# Altium PCB STM32 Core board.PcbDoc
Units mil, origin at the board's own origin, x right, y up, seen from the top; angles counter-clockwise.
Board outline 2495 x 2645 mil, 2 copper layers (Top Layer, Bottom Layer); 73 components, 59 nets, 237 pads, 40 vias.
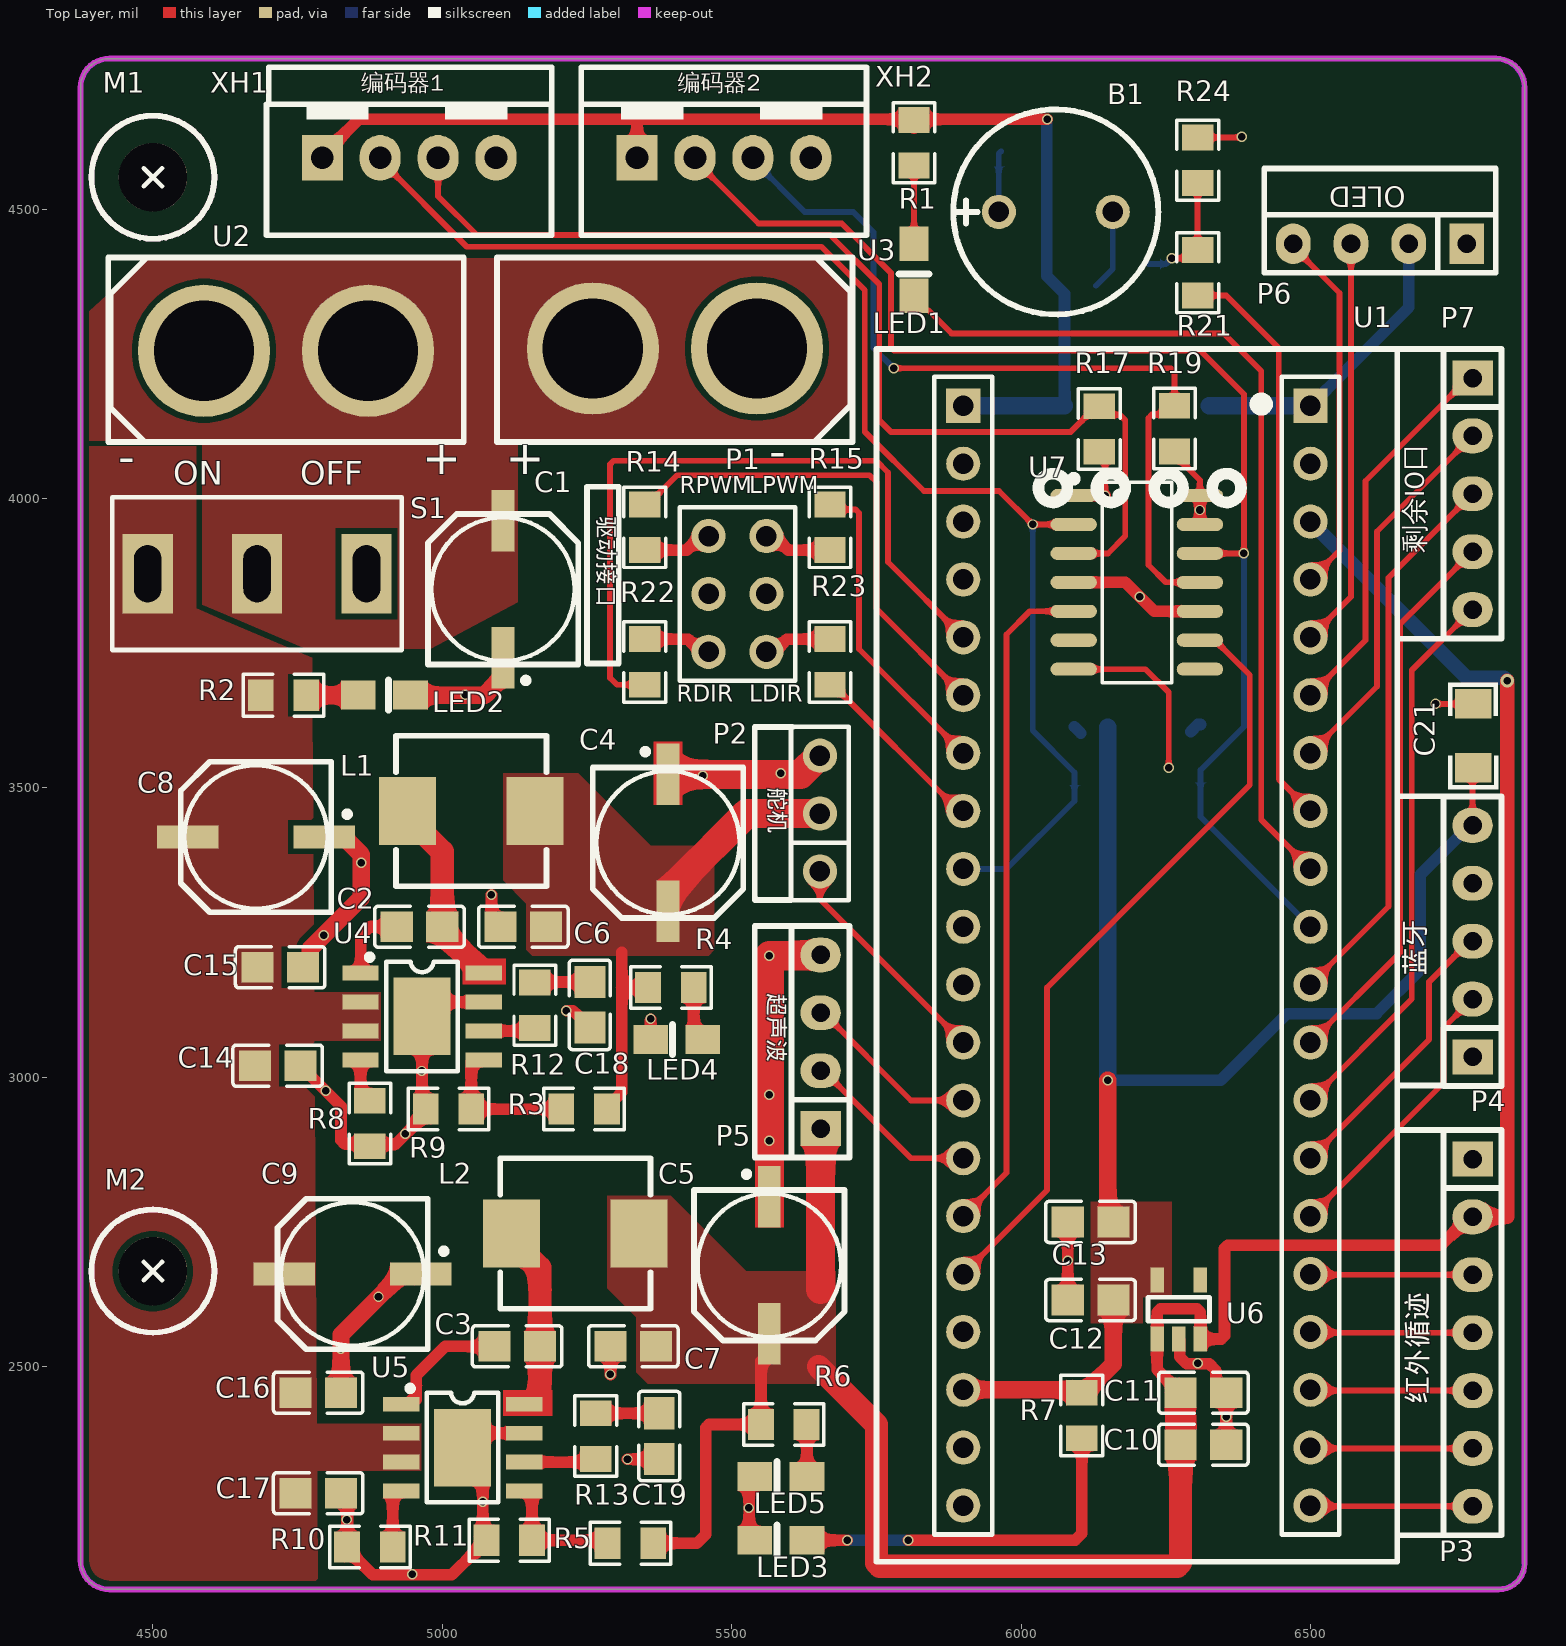
[diagram p0: Top Layer view]
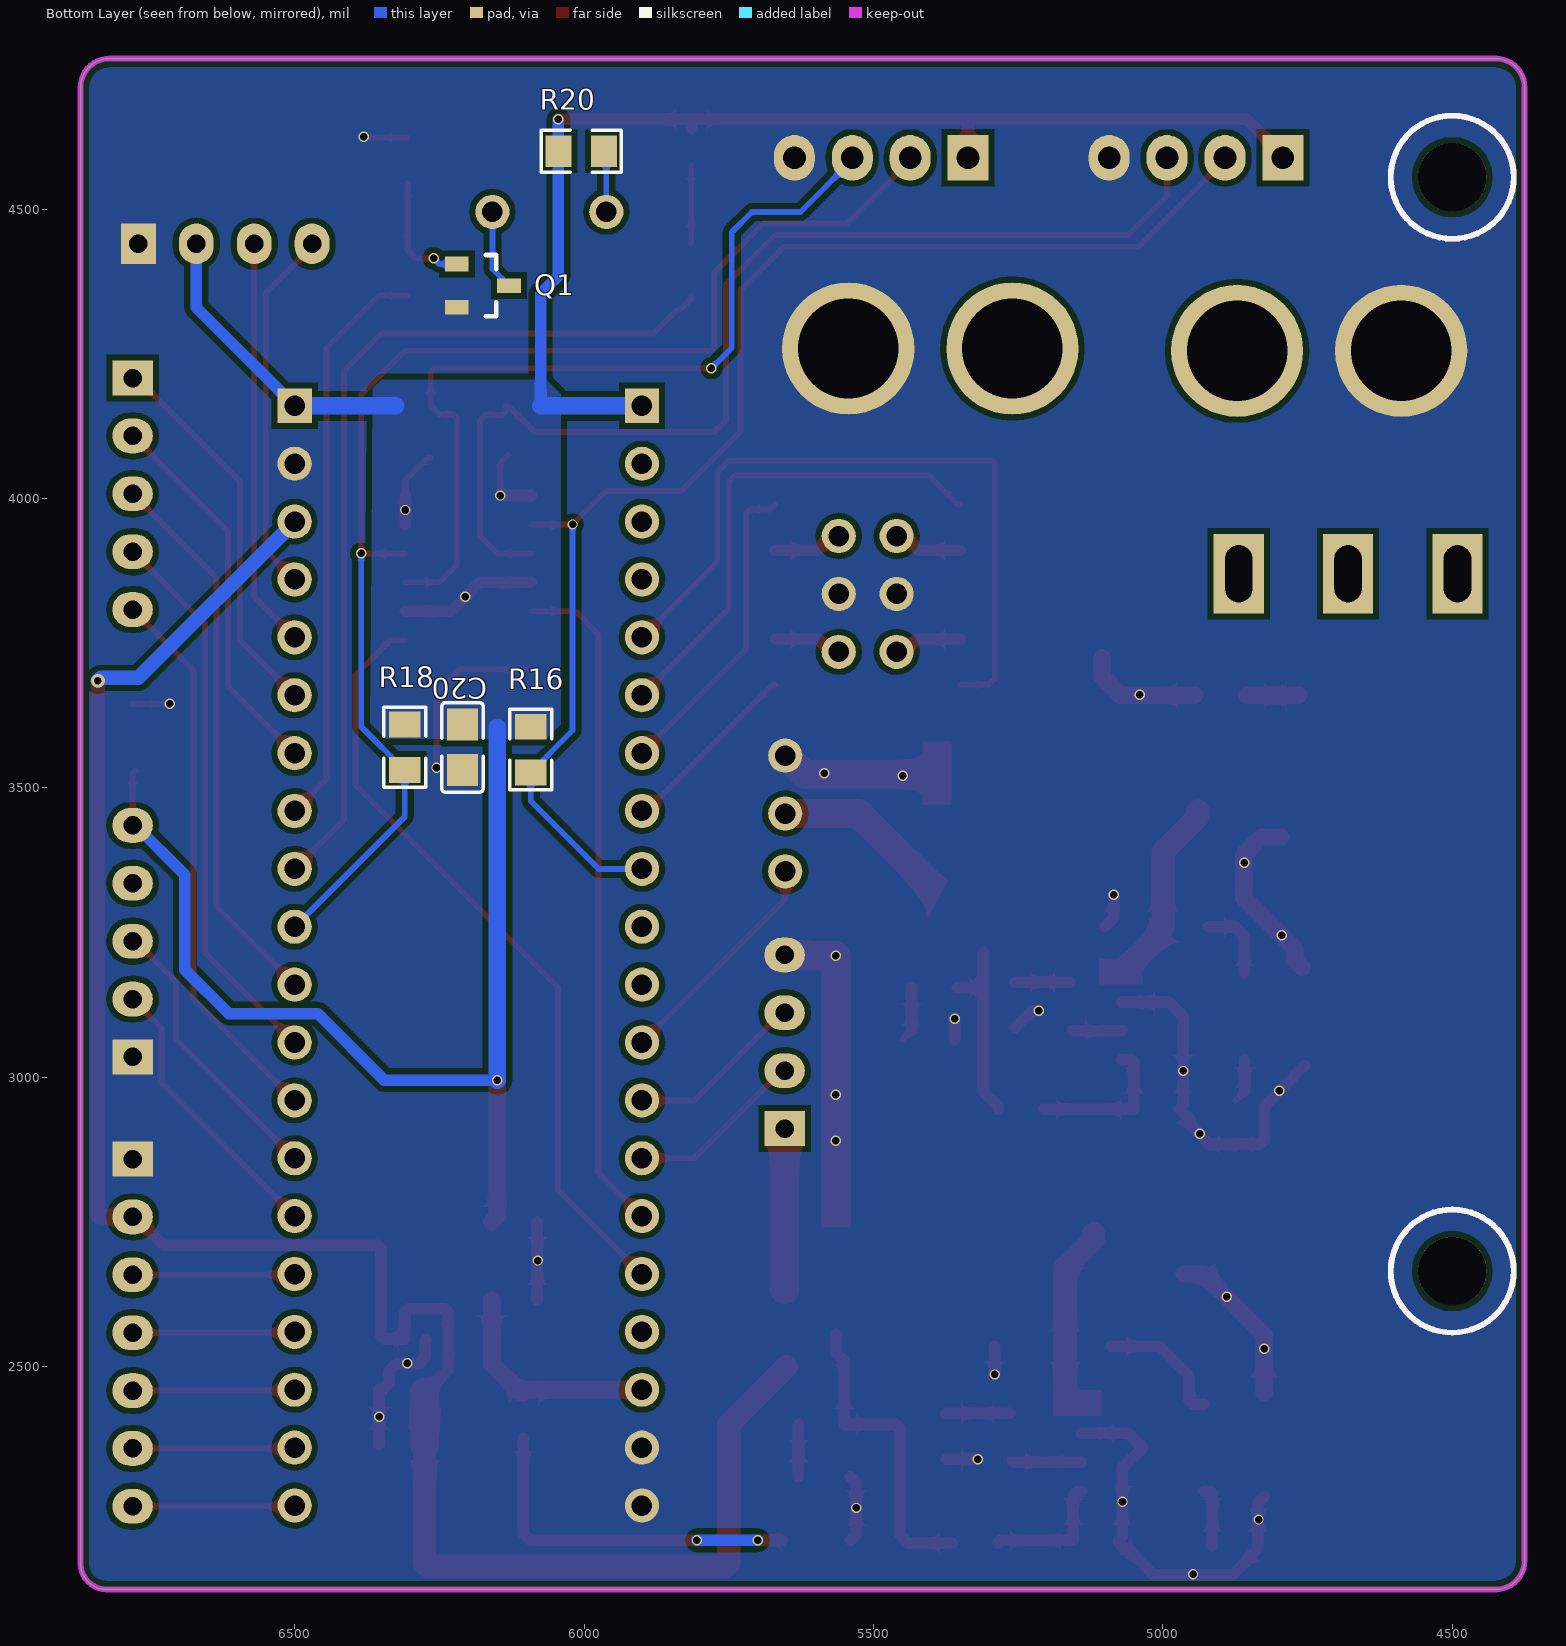
[diagram p1: Bottom Layer view, seen from below]

## Layer stack, top to bottom
Top Solder: solder mask 0.4, Solder Resist, Dk 3.5
Top Layer: signal copper 1.4
Dielectric 1: dielectric 12.6, FR-4, Dk 4.8
Bottom Layer: signal copper 1.4
Bottom Solder: solder mask 0.4, Solder Resist, Dk 3.5

## Board outline
4375,2165 4375,4710 cw(c4425,4710) 4425,4760 4440,4760 6820,4760 cw(c6820,4710) 6870,4710 6870,2160 cw(c6825,2160) 6825,2115 4425,2115 cw(c4425,2165)

## Design rules (kind name [scope] priority, off if disabled: settings)
Clearance [All] p1: gap=10 ignorepadtopadclearanceinfootprint=FALSE except(0: Arc-Hole Track-Hole SMDPad-Hole THPad-Hole Via-Hole Fill-Hole Poly-Hole Region-Hole Text-Hole)
PolygonConnect [All] p1: connectstyle=Direct reliefconductorwidth=10 reliefentries=4 polygonreliefangle="90 Angle" airgapwidth=10
RoutingVias [All] p1: holewidth=28 width=50 viastyle="Through Hole" minholewidth=28 minwidth=50 maxholewidth=28 maxwidth=50
SolderMaskExpansion [All] p1: expansion=4 istentingtop=FALSE
Width [All] p1: maxlimit=10 minlimit=10 preferedwidth=10
30 further rules are at their usual default settings.

## Components (designator, comment, footprint, x,y, rotation, side; value= is the part's Value field where it differs from the comment)
B1 "BEEP" "BEEP 9x5.5mm" 6060,4495 r0 top
C1 "220uF 25V 铝电解" "CAP-E-S 6.3" 5105,3843.11 r270 top value=220uF
C2 "100nF 50V X7R" C0805 4960.63,3260 r180 top value=100nF
C3 "100nF 50V X7R" C0805 5129.37,2535 r180 top value=100nF
C4 "220uF 25V 铝电解" "CAP-E-S 6.3" 5390,3405 r90 top value=220uF
C5 "220uF 25V 铝电解" "CAP-E-S 6.3" 5565,2675 r90 top value=220uF
C6 "47uF 25V X5R" C0805 5140,3260 r0 top value=47uF
C7 "47uF 25V X5R" C0805 5330,2535 r0 top value=47uF
C8 "100uF 35V 铝电解" "CAP-E-S 6.3" 4678.11,3415 r0 top value=100uF
C9 "100uF 35V 铝电解" "CAP-E-S 6.3" 4845,2660 r0 top value=100uF
C10 "10uF 25V X5R" C0805 6315,2365 r180 top value=10uF
C11 "100nF 50V X7R" C0805 6315,2455 r180 top value=100nF
C12 "10uF 25V X5R" C0805 6120,2615 r0 top value=10uF
C13 "100nF 50V X7R" C0805 6120,2750 r0 top value=100nF
C14 "4.7uF 35V X5R" C0805 4715.63,3020 r180 top value=4.7uF
C15 "100nF 50V X7R" C0805 4720,3190 r180 top value=100nF
C16 "4.7uF 35V X5R" C0805 4785.63,2455 r180 top value=4.7uF
C17 "100nF 50V X7R" C0805 4785.63,2281.19 r180 top value=100nF
C18 "4.7nF 50V X7R" C0805 5255,3125 r90 top value=4.7nF
C19 "4.7nF 50V X7R" C0805 5375,2380 r90 top value=4.7nF
C20 "100nF 50V X7R" C0805 6210,3570 r270 bottom value=100nF
C21 "10uF 35V X5R" CAPC3216[1206]S 6780.99,3589.82 r270 top value=10uF
L1 "4.7uH 5A" "0630 TPC 7*7*3" 5050,3460 r0 top value=4.7uH
L2 "4.7uH 5A" "0630 TPC 7*7*3" 5230,2730 r0 top value=4.7uH
LED1 "翠绿贴片LED" LED_0805 5815,4440 r270 top
LED2 "翠绿贴片LED" LED_0805 4855,3660 r0 top
LED3 "翠绿贴片LED" LED_0805 5630,2200 r180 top
LED4 "翠绿贴片LED" LED_0805 5450,3065 r180 top
LED5 "翠绿贴片LED" LED_0805 5630,2310 r180 top
M1 "MountHole" M3-MountHole 4500,4555 r0 top
M2 "MountHole" M3-MountHole 4500,2665 r0 top
P1 "Header-D-M 2x3P" HDR2X3-M 5560,3735 r90 top
P2 "Header-D-M 1x3P" HDR1X3-M 5652.51,3355.56 r90 top
P3 "Pin HDR1X7" "Pin HDR1X7/2.54mm-S" 6780,2858.62 r0 top
P4 "Female HDR1X5" Fe-HDR1X5/2.54-S 6780,3035 r180 top
P5 "Pin HDR1X4" "Pin HDR1X4/2.54mm-S" 5653.57,2911.22 r180 top
P6 "Female HDR1X4" Fe-HDR1X4/2.54-S 6770,4440 r270 top
P7 "Pin HDR1X5" "Pin HDR1X5/2.54mm-S" 6780,4208 r0 top
Q1 "S8050" SOT-23 6174.72,4367.6 r180 bottom
R1 "510R ±1%" "R0805 - duplicate" 5815,4614.37 r270 top value=510R
R2 "10K ±1%" "R0805 - duplicate" 4725.63,3660 r180 top value=10K
R3 "65K ±1%" "R0805 - duplicate" 5245,2945 r0 top value=65K
R4 "10K ±1%" "R0805 - duplicate" 5395,3155 r0 top value=10K
R5 "53.6k ±1%" "R0805 - duplicate" 5325,2195 r0 top value=53.6k
R6 "10K ±1%" "R0805 - duplicate" 5590,2400 r0 top value=10K
R7 "2.7K ±1%" "R0805 - duplicate" 6105,2415.63 r270 top value=2.7K
R8 "200K ±1%" "R0805 - duplicate" 4875,2920 r90 top value=200K
R9 "10K ±1%" "R0805 - duplicate" 5010.63,2945 r180 top value=10K
R10 "200K ±1%" "R0805 - duplicate" 4875,2188.4 r0 top value=200K
R11 "10K ±1%" "R0805 - duplicate" 5115.63,2200 r180 top value=10K
R12 "20K ±1%" "R0805 - duplicate" 5160,3124.37 r270 top value=20K
R13 "20K ±1%" "R0805 - duplicate" 5265,2380 r270 top value=20K
R14 "100R ±1%" "R0805 - duplicate" 5350,3950 r270 top value=100R
R15 "100R ±1%" "R0805 - duplicate" 5669.76,3950 r270 top value=100R
R16 "5.1K ±1%" "R0805 - duplicate" 6092.18,3566.04 r90 bottom value=5.1K
R17 "5.1K ±1%" "R0805 - duplicate" 6135,4120 r270 top value=5.1K
R18 "5.1K ±1%" "R0805 - duplicate" 6310,3570 r90 bottom value=5.1K
R19 "5.1K ±1%" "R0805 - duplicate" 6265,4120.63 r270 top value=5.1K
R20 "10R ±1%" "R0805 - duplicate" 6005,4600 r180 bottom value=10R
R21 "4.7K ±1%" "R0805 - duplicate" 6305,4390 r90 top value=4.7K
R22 "100R ±1%" "R0805 - duplicate" 5350,3717.52 r270 top value=100R
R23 "100R ±1%" "R0805 - duplicate" 5669.76,3717.52 r270 top value=100R
R24 "1K ±1%" "R0805 - duplicate" 6305,4584.37 r90 top value=1K
S1 "SW-SPDT" SS12D10 4680,3870 r0 top
U1 "STM32 40Pin Core board" "STM32 CORE BOARD" 6220,3218 r90 top
U2 "XT60" CONN-TH_XT60 4730,4255 r0 top
U3 "XT60" CONN-TH_XT60 5401.85,4258.9 r180 top
U4 "SCT2450" SOP-8E 4965,3105 r0 top
U5 "SCT2450" SOP-8E 5035,2360 r0 top
U6 "RT9013-33" SOT-23-5 6272.4,2598.82 r90 top
U7 "SN74HC74D" SOIC-14_L8.7-W3.9-P1.27-LS6.0-BL 6200,3855 r270 top
XH1 "XH4" "XH4/2.54mm/180 - duplicate" 4792.76,4588.42 r0 top
XH2 "XH4" "XH4/2.54mm/180 - duplicate" 5336.63,4588.42 r0 top

## Footprints (in the part's own frame and the unit in brackets; to place one, negate y for a bottom-side part, rotate by r counter-clockwise, add the part's x,y. Pads: shape width x height; smd on the part's side, far side on the other; paste and mask are expansions set on the pad)
"0630 TPC 7*7*3" [mm] "12mmx12mmx6.5mm 一体成型功率电感"
  rect 2.5x3 smd: 1(-2.8,0) 2(2.8,0)
  silkscreen extent -3.3,-3.3 3.3,3.3, body extent -3.3,-3.3 3.3,3.3, height 3
"BEEP 9x5.5mm" [mm] "蜂鸣器 9x5.5mm"
  round 1.5 hole 0.9: 1(-2.5,0) 2(2.5,0)
  silkscreen extent -4.5,-4.5 4.5,4.5, body extent -4.77,-4.8 4.83,4.8, height 5.05
C0805 [mm]
  rect 1.41x1.35 smd paste-100 mask+0.051: 1(-1,0) 2(1,0)
  silkscreen extent -1.96,-0.9 1.96,0.9
"CAP-E-S 6.3" [mm] "贴片 铝电解电容 6.3mm"
  rect 2.7x1 smd: 1(-3,0) 2(3,0)
  silkscreen extent -3.3,-3.3 4.12,3.3, body extent -3.5,-3.3 3.5,3.3, height 5.2
CAPC3216[1206]S [mm] "1206贴片电容 有丝印 2脚 3.20x1.60mm IPC中密度"
  rect 1.3x1.6 smd: 1(-1.4,0) 2(1.4,0)
  silkscreen extent -2.35,-1.11 2.35,1.11, body extent -1.6,-0.81 1.6,0.81, height 1.21
CONN-TH_XT60 [mm]
  round 5.8 hole 4.4 paste+0 mask+0.05: 1(-3.6,0) 2(3.6,0)
  silkscreen extent -7.8,-4 7.8,4.1
Fe-HDR1X4/2.54-S [mil]
  rect 70x60 hole 32: 1(0,0)
  oval 70x60 hole 32: 2(0,-100) 3(0,-200) 4(0,-300)
  silkscreen extent -50,-350 50,50, body extent -44,-355 54,55, height 335
Fe-HDR1X5/2.54-S [mil]
  rect 70x60 hole 32: 1(0,0)
  oval 70x60 hole 32: 2(0,-100) 3(0,-200) 4(0,-300) 5(0,-400)
  silkscreen extent -50,-450 50,50, body extent -50,-455 48,55, height 126
HDR1X3-M [mm] "1x3pin, 2.54mm间距, 直插, 直排针"
  round 1.5 hole 0.9: 1(0,0) 2(2.54,0) 3(5.08,0)
  silkscreen extent -1.27,-1.27 6.35,1.27, body extent -1.27,-1.27 6.35,1.27, height 8.54
HDR2X3-M [mm] "2x3pin, 2.54mm间距, 直插, 直排针"
  round 1.5 hole 0.9: 1(0,0) 2(0,2.54) 3(2.54,0) 4(2.54,2.54) 5(5.08,0) 6(5.08,2.54)
  silkscreen extent -1.27,-1.27 6.35,3.81, body extent -1.27,-1.27 6.35,3.81, height 8.54
LED_0805 [mil]
  rect 60x50 smd: A(0,0) C(90,0)
  silkscreen extent 52,-26 52,26, body extent 5,-23 85,27, height 43
M3-MountHole [mm] "M3-MountHole"
  round 3 hole 3 unplated mask+0: 1(0,0)
  Keep-Out Layer circle w0.254: c0,0 r2.7
  silkscreen extent -2.7,-2.7 2.7,2.7
"Pin HDR1X4/2.54mm-S" [mil]
  rect 70x60 hole 32: 1(0,0)
  oval 70x60 hole 32: 2(0,-100) 3(0,-200) 4(0,-300)
  silkscreen extent -50,-350 50,50, body extent -50,-350 50,50, height 336
"Pin HDR1X5/2.54mm-S" [mil]
  rect 70x60 hole 32: 1(0,0)
  oval 70x60 hole 32: 2(0,-100) 3(0,-200) 4(0,-300) 5(0,-400)
  silkscreen extent -50,-450 50,50, body extent -50,-450 50,50, height 336
"Pin HDR1X7/2.54mm-S" [mil]
  rect 70x60 hole 32: 1(0,0)
  oval 70x60 hole 32: 2(0,-100) 3(0,-200) 4(0,-300) 5(0,-400) 6(0,-500) 7(0,-600)
  silkscreen extent -50,-650 50,50, body extent -50,-650 50,50, height 336
"R0805 - duplicate" [mm]
  rect 1.133x1.377 smd paste-100 mask+0.051: 1(-1,0) 2(1,0)
  silkscreen extent -1.76,-0.92 1.76,0.92
SOIC-14_L8.7-W3.9-P1.27-LS6.0-BL [mil]
  oval 22.6x80.24 smd: 1(-150,-109.02) 2(-100,-109.02) 3(-50,-109.02) 4(0,-109.02) 5(50,-109.02) 6(100,-109.02) 7(150,-109.02) 8(150,109.02) 9(100,109.02) 10(50,109.02) 11(0,109.02) 12(-50,109.02) 13(-100,109.02) 14(-150,109.02)
  silkscreen extent -185,-115 173,60
SOP-8E [mm] "SOIC,1.27mm pitch;8 pin,3.90mm W X 4.88mm L X 1.73mm H body"
  rect 2.5x3.4 smd: 0(0,0)
  rect 1.6x0.65 smd: 1(-2.7,1.905) 2(-2.7,0.635) 3(-2.7,-0.635) 4(-2.7,-1.905) 5(2.7,-1.905) 6(2.7,-0.635) 7(2.7,0.635) 8(2.7,1.905)
  silkscreen extent -2.42,-2.4 1.58,2.72, body extent -3.11,-2.45 3.11,2.45, height 1.75
SOT-23 [mm] "SOT23, 3-Leads, Body 2.90x2.40mm, Pitch 0.95mm, IPC Medium Density"
  rect 1.05x0.65 smd: 1(-1.15,0.95) 2(-1.15,-0.95) 3(1.15,0)
  silkscreen extent 0.13,-1.35 0.58,1.35, body extent -1.4,-1.45 1.4,1.45, height 1.2
SOT-23-5 [mm] "SOT23, 5-Leads, Body 2.92x2.79mm, Pitch 0.95mm, IPC Medium Density"
  rect 1.1x0.6 smd: 1(-1.3,0.95) 2(-1.3,0) 3(-1.3,-0.95) 4(1.3,-0.95) 5(1.3,0.95)
  silkscreen extent -0.53,-1.35 0.53,1.35, body extent -1.42,-1.46 1.42,1.46, height 1.08
SS12D10 [mm] "拨动开关，直脚，脚距4.8"
  rect 2.2x3.5 hole 1.2 slot 2.5 at 90 deg mask+0.07: 1(-4.8,0) 2(0,0) 3(4.8,0)
  silkscreen extent -6.35,-3.35 6.35,3.35, body extent -6.4,-3.3 6.35,3.8, height 12.5
"STM32 CORE BOARD" [mm]
  rect 1.5x1.5 hole 0.9: 1(23.927,-7.112) 21(23.927,8.128)
  round 1.5 hole 0.9: 2(21.387,-7.112) 3(18.847,-7.112) 4(16.307,-7.112) 5(13.767,-7.112) 6(11.227,-7.112) 7(8.687,-7.112) 8(6.147,-7.112) 9(3.607,-7.112) 10(1.067,-7.112) 11(-1.473,-7.112) 12(-4.013,-7.112) 13(-6.553,-7.112) 14(-9.093,-7.112) 15(-11.633,-7.112) 16(-14.173,-7.112) 17(-16.713,-7.112) 18(-19.253,-7.112) 19(-21.793,-7.112) 20(-24.333,-7.112) 22(21.387,8.128) 23(18.847,8.128) 24(16.307,8.128) 25(13.767,8.128) 26(11.227,8.128) 27(8.687,8.128) 28(6.147,8.128) 29(3.607,8.128) 30(1.067,8.128) 31(-1.473,8.128) 32(-4.013,8.128) 33(-6.553,8.128) 34(-9.093,8.128) 35(-11.633,8.128) 36(-14.173,8.128) 37(-16.713,8.128) 38(-19.253,8.128) 39(-21.793,8.128) 40(-24.333,8.128)
  silkscreen extent -26.8,-10.92 26.42,11.94
"XH4/2.54mm/180 - duplicate" [mm]
  rect 1.8x2 hole 1: 1(0,0)
  oval 1.8x2 hole 1: 2(2.54,0) 3(5.08,0) 4(7.62,0)
  silkscreen extent -2.45,-3.4 10.07,2.35, body extent -2.39,-3.3 10.01,2.45, height 7

## Part data
B1: "蜂鸣器"
C1 C4 C5: library part "E-S 220uF 25V 6.3x7.7", "贴片电解电容 220uF 25V 6.3x7.7", Voltage=25V, Revision=V1.0, Type=铝电解
C2 C3 C11 C13 C15 C17 C20: library part "100nF 0603 50V X7R", "贴片瓷片电容; MLCC; 0603(1608);", Voltage=50V, Revision=V1.0, Type=X7R
C6 C7 C10 C12: library part "47uF 1206 25V X5R", "贴片瓷片电容; MLCC; 1206(3216);", Voltage=25V, Revision=V1.0, Type=X5R
C8 C9: library part "E-S 100uF 35V 6.3x7.7", "贴片电解电容 100uF 35V 6.3x7.7", Voltage=35V, Revision=V1.0, Type=铝电解
C14 C16 C21: library part "4.7uF 1206 35V X5R", "贴片瓷片电容; MLCC; 1206(3216);", Voltage=35V, Revision=V1.0, Type=X5R
C18 C19: library part "4.7nF 0603 50V X7R", "贴片瓷片电容; MLCC; 0603(1608);", Voltage=50V, Revision=V1.0, Type=X7R
L1 L2: library part Ind-Power, "功率电感", DCR=.5m, Imax=5A, Price(RMB)=0.000, Published=8-Jun-2000, Publisher="Altium Limited", Revision="July-2002: Re-released for DXP Platform."
LED1 LED2 LED3 LED4 LED5: library part "LED Chip Green", Price(RMB)=0.00, Published=8-Jun-2000, Publisher="Altium Limited", Revision="July-2002: Re-released for DXP Platform."
M1 M2: "固定孔"
P1: "2x3pin, 直插, 双排针", Revision=V1.0
P2: "1x3pin, 直插, 排针", Revision=V1.0
Q1: library part "NPN S8050", "NPN 三极管", PartNumber=S8050, Price(RMB)=0.000, Published=8-Jun-2000, Publisher="Altium Limited", Revision="July-2002: Re-released for DXP Platform."
R1 R14 R15 R22 R23: library part Res-Chip_9, "贴片电阻", Power=1/8W, Tolerance=±1%, Revision=V1.0
R2 R4 R6 R9 R11: library part Res-Chip, "贴片电阻", Power=1/8W, Tolerance=±1%, Revision=V1.0
R3 R5 R12 R13: library part Res-Chip_4, "贴片电阻", Power=1/8W, Tolerance=±1%, Revision=V1.0
R7: library part Res-Chip_6, "贴片电阻", Power=1/8W, Tolerance=±1%, Revision=V1.0
R8 R10: library part Res-Chip_1, "贴片电阻", Power=1/8W, Tolerance=±1%, Revision=V1.0
R16 R17 R18 R19 R21: library part Res-Chip_3, "贴片电阻", Power=1/8W, Tolerance=±1%, Revision=V1.0
R20: library part Res-Chip_10, "贴片电阻", Power=1/8W, Tolerance=±1%, Revision=V1.0
R24: library part Res-Chip_11, "贴片电阻", Power=1/8W, Tolerance=±1%, Revision=V1.0
S1: "单刀双掷开关 3脚船型、钮子、拨动开关 SPDT Subminiature Toggle Switch", Price(RMB)=0.000, Published=24-Mar-1999, Publisher="Altium Limited"
U1: library part "STM32 Core board", "江协科技STM32F103C8T6核心板"
U2 U3: Colour=黄色, contact resistance=-, JLCPCB Part Class="Extended Part", LCSC Part Name="AMASS(艾迈斯) XT60模型插头 3.5mm镀金香蕉头公头（电调端）XT60-M", Manufacturer=AMASS(艾迈斯), Add into BOM=yes, Belt length=-, Brand=艾迈斯, Convert to PCB=yes, Datasheet=https://atta.szlcsc.com/upload/public/pdf/source/20170606/1496716524919.pdf, Device=XT60, FlameRetardantGrade=-, Input=-, InsulationMaterial=-, Interface=-, InterfaceType=公头, Manufacturer Part=XT60, MaximumCurrent=-, MetalMaterial=-, Model=XT60, Name=XT60, NumberOfUSBHoles=-, Output=-, Power=-, RatedCurrent=-, RatedVoltage=-, RecommendedWireGauge=-, Size=-, specifications=3.5mm, Supplier=LCSC, Supplier Footprint=-, Supplier Part=C98733, Symbol=XT60, Type=香蕉头, Type1=-
U4 U5: library part SP1N28STER, "SP1N28STER", Revision=V1.0
U6: "3.3V 500mA SOT-23-5 LDO"
U7: Clock Frequency=60MHz, Input Capacitance=3pF, JLCPCB Part Class="Extended Part", Manufacturer=TI(德州仪器), Operating Temperature=-40℃~+85℃, Quiescent Current (Iq)=4uA, Sink Current=5.2mA, Supply Voltage=2V~6V, Add into BOM=yes, Convert to PCB=yes, Datasheet=https://www.ti.com/cn/lit/gpn/sn74hc74, Device=SN74HC74D, Function=置位和复位, LCSC Part Name=SN74HC74D, Manufacturer Part=SN74HC74D, Maximum Propagation Delay=15ns@6V,50pF, Name=SN74HC74D, Number of Bits per Element=1, Number of Elements=2, Output Type=互补型, Series=74HC系列, Source Current=5.2mA, Supplier=LCSC, Supplier Footprint=SOIC-14, Supplier Part=C347585, Symbol=SN74HC74D, Trigger Type=上升沿, Type=D-型

## Via types
v1: diameter 18, hole 13, Top Layer to Bottom Layer, 39 vias
v2: diameter 24, hole 13, Top Layer to Bottom Layer, 1 vias

## Nets (pads, with @x,y where several pads share a name; then routed paths per layer and width w, separated by ;. In a path a pad name is that pad's centre, name@x,y a point inside that pad or via, vN(x,y) a via of type N, cw(c..) or ccw(c..) an arc to the next point about the centre after c; other vN are vias at no path point)
1Q: U1.35 U7.5 | length 1168.6
  Top Layer w10: U1.35 5975,2835 5975,3765 6015,3805 U7.5
2Q: U1.36 U7.9 | length 1350.9
  Top Layer w10: U1.36 6045,2805 6045,3155 6395,3505 6395,3695 6335,3755 U7.9
A1: R16.1 U1.29 U7.2 XH1.2 | length 2354.9
  Top Layer w10: XH1.2 4892.76,4584.49 5042.25,4435 5655,4435 5730,4360 5730,4115 5832.06,4012.94 5962.06,4012.94 v1(6020,3955) U7.2
  Bottom Layer w10: U1.29 5975,3360 6092.18,3477.18 R16.1 6020,3598.85 v1(6020,3955)
A2: R18.1 U1.10 U7.12 XH2.2 | length 2299.6
  Top Layer w10: XH2.2 5436.63,4584.49 5546.12,4475 5690,4475 5775,4390 5775,4260.86 5780.86,4255 6310,4255 6385,4180 v1(6385,3905) U7.12
  Bottom Layer w10: R18.1 6310,3450 U1.10 ; R18.1@6311.2,3531.83 6385,3605.63 v1(6385,3905)
A11: P7.5 U1.13 | length 964
  Top Layer w10: U1.13 6675,3135 6675,3703 P7.5
A12: P7.4 U1.12 | length 964
  Top Layer w10: U1.12 6655,3215 6655,3783 P7.4
A15: P7.3 U1.11 | length 964
  Top Layer w10: U1.11 6635,3295 6635,3863 P7.3
B1: R17.1 U7.3 XH1.3 | length 1885.8
  Top Layer w10: XH1.3 4992.76,4522.24 5060,4455 5670,4455 5755,4370 5755,4135 5775,4115 6085.82,4115 6130.19,4159.37 R17.1 ; U7.3 6150,3905 6180,3935 6180,4135 6170.62,4144.38 6140.62,4144.38 R17.1@6135,4150
B2: R19.1 U7.11 XH2.3 | length 1469.2
  Top Layer w10: v1(5780,4225) 6259.14,4225 6265,4219.14 R19.1 6250,4145 6225.86,4145 6220,4139.14 6220,3885 6250,3855 U7.11
  Bottom Layer w10: XH2.3 5536.63,4584.49 5626.11,4495 5710,4495 5745,4460 5745,4260 v1(5780,4225)
B6: P7.2 U1.7 | length 664
  Top Layer w10: U1.7 6615,3675 6615,3943 P7.2
B7: P7.1 U1.6 | length 668.9
  Top Layer w10: U1.6 6595,3755 6595,4030 6748,4183 6753,4183 P7.1@6780,4210
BUZZER: R21.1 U1.8 | length 1000.3
  Top Layer w10: R21.1 6354.37,4350.63 6445,4260 6445,3515 U1.8
Echo: P5.3 U1.33 | length 309.1
  Top Layer w10: P5.3 5658.57,3111.22 5809.79,2960 U1.33
GND: C1.2 C4.2 C5.2 C6.1 C7.1 C8.2 C9.2 C10.1 C11.1 C12.1 C13.1 C14.1 C15.1 C16.1 C17.1 C18.1 C19.1 C20.2 C21.1 LED2.C LED3.C LED4.C LED5.C P1.3 P1.4 P2.3 P3.1 P4.1 P5.4 P6.1 Q1.2 R8.1 R9.2 R10.1 R11.2 R24.2 U1.2 U1.39 U1.40 U2.1 U3.1 U4.0 U4.7 U5.0 U5.7 U6.2 U7.7 XH1.4 XH2.4 | length 4084.3
  Top Layer w10: C19.1@5374.37,2340 C19.1 ; U7.7 6215,3705 6255,3665 v1(6255,3535) ; R24.2 v1@6381.26,4623.74 ; v1(6715.99,3644.94) C21.1
  Top Layer w20: C14.1 4756.18,3020 4772.76,3003.43 4772.76,3002.24 4825,2950 4825,2890.86 4830.86,2885 4870.63,2885 R8.1 4878.56,2884.19 4919.19,2884.19 4953.97,2918.97 4953.97,2927.71 R9.2 4965,2951.26 U4.0 4990,3130 U4.7 ; C17.1@4825,2275 4835.82,2264.18 4835.82,2185 4847.92,2172.89 4847.92,2172.08 4879.63,2140.37 5016.63,2140.37 5054.15,2177.89 5058.97,2177.89 5076.26,2195.19 R11.2 5070,2206.26 5070,2325 U5.0 5060,2385 U5.7 ; v1(5085,3315) 5085,3275.63 C6.1 ; v1@5215,3115 5225.63,3115 5232.24,3108.39 5233.43,3108.39 5255,3086.81 C18.1 ; v1@5290.63,2485.63 C7.1 ; v1(5320,2340) C19.1@5374.37,2340 ; LED4.C v1@5360,3100 ; LED3.C 5530,2210 5530,2300 LED5.C ; C12.1 C13.1 ; U6.2 6274.21,2545.83 6274.21,2516.72 6285.93,2505 6324.9,2505 6336.61,2493.28 6336.61,2471.57 6353.19,2455 C11.1 ; C10.1 C11.1@6354.37,2460
  Top Layer w30: C15.1 4760.55,3190 4772.13,3201.57 4772.13,3222.13 4860,3310 4860,3330 4859.79,3330.21 v1(4859.79,3370.81) ; C8.2 4829.68,3415 4860,3384.68 v1@4860,3370 ; C16.1 4825,2555.35 4929.65,2660 C9.2 ; LED2.C 5073.46,3660 5105,3691.54 C1.2
  Top Layer w50: C4.2 5618.69,3523.11 5651.14,3555.56 P2.3 ; C5.2 v1(5565,3210) 5652.35,3210 P5.4
  other v1: 4947.92,2141.17 4834.79,2235.81 5529.79,2255.81 5069.79,2266.44 6354.16,2413.31 5290.42,2486.44 6305.2,2505.81 4824.79,2530.81 4889.79,2620.81 6080.42,2683.31 5565,2890 4936.36,2902.38 5565,2970 4798.66,2976.93 4964.79,3010.81 5359.79,3100.81 5214.51,3114.94 4795,3245 5449.79,3520.81 5585,3525 5039.79,3660.81 6381.05,4624.55
L_EN_OUT: R15.1 U1.27 | length 545.7
  Top Layer w10: R15.1 5678.27,3980.86 5714.14,3980.86 5720,3975 5720,3740 U1.27
L_PH_OUT: R23.2 U1.28 | length 320.6
  Top Layer w10: R23.2 5674.57,3678.15 5892.73,3460 U1.28
LED: LED1.C U1.9 | length 1552
  Top Layer w10: LED1.C 5815,4345 5835,4325 5840,4325 5880,4285 6350,4285 6415,4220 6415,3445 U1.9
NetB1_1: B1.1 R20.2 | length 106.7
  Bottom Layer w10: B1.1 5961.57,4595.94 R20.2
NetB1_2: B1.2 Q1.3 | length 139.4
  Bottom Layer w10: Q1.3 6158.43,4396.57 B1.2
NetC2_1: C2.1 L1.1 U4.8 | length 327.5
  Top Layer w40: L1.1 4939.76,3450.16 5000,3389.92 C2.1 5001.18,3260 5007.76,3253.43 5007.76,3243.54 5059.8,3191.5 U4.8@5059.8,3187.2 ; U4.8@5067.01,3180 U4.8
NetC2_2: C2.2 U4.1 | length 131.9
  Top Layer w20: U4.1@4859.46,3180.76 4859.46,3244.46 4875,3260 C2.2
NetC3_1: C3.1 L2.1 U5.8 | length 337.6
  Top Layer w40: L2.1 5119.76,2720.16 5168.74,2671.18 C3.1 5168.74,2443.74 5160,2435 U5.8
NetC3_2: C3.2 U5.1 | length 227.6
  Top Layer w20: U5.1 4947.4,2435 4955.2,2442.8 4955.2,2485.2 5005,2535 C3.2
NetC18_2: C18.2 R12.1 | length 95.3
  Top Layer w10: R12.1 R12.1@5160.63,3164.37
  Top Layer w20: R12.1@5160.63,3164.37 C18.2
NetC19_2: C19.2 R13.1 | length 110
  Top Layer w20: R13.1 C19.2
NetLED1_A: LED1.A R1.2 | length 135
  Top Layer w10: LED1.A R1.2
NetLED2_A: LED2.A R2.1 | length 90
  Top Layer w30: R2.1 LED2.A
NetLED3_A: LED3.A R7.2 | length 616.6
  Top Layer w20: LED3.A@5657.81,2200 v1(5700,2200) ; v1(5805,2200) 6093.28,2200 6105,2211.72 R7.2
  Bottom Layer w20: v1(5700,2200) v1(5805,2200)
NetLED4_A: LED4.A R4.2 | length 96.5
  Top Layer w10: LED4.A@5434.37,3080.63 LED4.A
  Top Layer w20: LED4.A@5434.37,3080.63 R4.2
NetLED5_A: LED5.A R6.2 | length 90.3
  Top Layer w20: R6.2 5630,2399.37 LED5.A
NetP1_1: P1.1 R23.1 | length 118.8
  Top Layer w20: P1.1 5573.27,3735 5595.17,3756.89 R23.1
NetP1_2: P1.2 R22.1 | length 119.1
  Top Layer w20: R22.1 5424.83,3756.89 5446.73,3735 P1.2
NetP1_5: P1.5 R15.2 | length 119.9
  Top Layer w20: P1.5 5573.27,3935 5597.64,3910.63 R15.2
NetP1_6: P1.6 R14.2 | length 120.1
  Top Layer w20: R14.2 5422.36,3910.63 5446.73,3935 P1.6
NetQ1_1: Q1.1 R21.2 R24.1 | length 210.7
  Top Layer w10: v1(6260,4415) 6290.63,4415 R21.2 R24.1
  Bottom Layer w10: Q1.1 6250,4405 v1(6260,4415)
NetR3_1: R3.1 R9.1 U4.5 | length 260.3
  Top Layer w20: U4.5 5052.8,3030 5050,3027.2 R9.1 R3.1
NetR5_1: R5.1 R11.1 U5.5 | length 226.8
  Top Layer w20: U5.5 5147.2,2285 5155,2277.2 R11.1 5280.63,2200 R5.1
NetR8_2: R8.2 U4.4 | length 77.4
  Top Layer w10: R8.2@4858.7,2975.67 R8.2
  Top Layer w20: R8.2@4858.7,2975.67 U4.4
NetR10_2: R10.2 U5.4 | length 125.9
  Top Layer w10: U5.4@4913.74,2277.2 4921.54,2285 U5.4
  Top Layer w20: R10.2@4914.37,2190 4914.37,2282.2 4917.17,2285 U5.4
NetR12_2: R12.2 U4.6 | length 90.8
  Top Layer w10: R12.2@5155,3080 R12.2
  Top Layer w20: U4.6 R12.2@5155,3080
NetR13_2: R13.2 U5.6 | length 126
  Top Layer w10: R13.2@5259.37,2335 R13.2
  Top Layer w20: U5.6 R13.2@5259.37,2335
OUT1: P3.3 U1.16 | length 278.6
  Top Layer w10: U1.16@6501.38,2658.62 P3.3
OUT2: P3.4 U1.17 | length 278.6
  Top Layer w10: U1.17@6501.38,2558.62 P3.4
OUT3: P3.5 U1.18 | length 278.6
  Top Layer w10: U1.18@6501.38,2458.62 P3.5
OUT4: P3.6 U1.19 | length 278.6
  Top Layer w10: U1.19@6501.38,2358.62 P3.6
OUT5: P3.7 U1.20 | length 278.6
  Top Layer w10: U1.20@6501.38,2258.62 P3.7
PWM: P2.1 U1.32 | length 398.1
  Top Layer w10: P2.1 5652.51,3307.49 U1.32
R_EN_OUT: R14.1 U1.26 | length 856.2
  Top Layer w10: R14.1 5354.81,3989.37 5405.44,4040 5738.28,4040 5750,4028.28 5750,3810 U1.26
R_PH_OUT: R22.2 U1.25 | length 1263.7
  Top Layer w10: R22.2 5301.72,3678.15 5290,3689.87 5290,4059.14 5295.86,4065 5750,4065 5770,4045 5770,3890 U1.25
RX: P4.2 U1.15 | length 491
  Top Layer w10: U1.15 6730,2990 6730,3085 P4.2
SCL: P6.3 U1.5 | length 709
  Top Layer w10: U1.5 6570,3830 P6.3
SDA: P6.4 U1.4 | length 633.8
  Top Layer w10: P6.4 6470,4435 6550,4355 6550,3910 U1.4
Trig: P5.2 U1.34 | length 309.1
  Top Layer w10: P5.2 5658.57,3011.22 5809.79,2860 U1.34
TX: P4.3 U1.14 | length 493.9
  Top Layer w10: U1.14 6705,3065 6705,3165 6775,3235 P4.3
VCC: C8.1 C9.1 C14.2 C15.2 C16.2 C17.2 R2.2 S1.1 U4.2 U4.3 U5.2 U5.3
VCC3v3: C12.2 C13.2 C20.1 C21.2 P4.5 P6.2 R1.1 R7.1 R16.2 R17.2 R18.2 R19.2 R20.1 U1.1 U1.21 U1.38 U6.5 U7.1 U7.4 U7.10 U7.13 U7.14 XH1.1 XH2.1 | length 5362.5
  Top Layer w10: 5336.63,4651.63 5340,4655 ; R17.2@6130.63,4075.63 6145,4061.26 v1(6145,4005) ; R19.2@6265,4070.63 6269.81,4070.63 6309.02,4031.42 U7.14 ; C21.2@6775,3529.76 6780,3524.76 P4.5
  Top Layer w20: XH1.1 4792.76,4592.36 4855.4,4655 5340,4655 v1(6045,4655) ; XH2.1 5336.63,4651.63 ; R1.1@5815,4640 R1.1@5815,4649.14 ; U7.4 6180,3855 v1(6205,3830) 6230,3805 U7.10 ; U7.1 v1(6145,4005) ; U7.13 v1(6309.02,3980) U7.14
  Top Layer w30: U1.38 6100,2460 R7.1 ; R7.1@6109.81,2455 6159.37,2504.56 C12.2 ; v1(6150,2995) 6150,2759.37 C13.2
  Bottom Layer w10: v1@6044.37,4654.37 v1(6045,4655) ; P4.5@6775,3435 P4.5
  Bottom Layer w20: v1@6044.37,4654.37 R20.1 6044.37,4384.26 6075,4353.63 6075,4160 ; R16.2 R16.2@6102.95,3594.64 ; v1(6150,2995) 6345,2995 6460,3110 6614.14,3110 6689.79,3185.65 6689.79,3349.79 P4.5@6775,3435 ; R18.2@6292.89,3597.08 6305.19,3609.37 R18.2 ; U1.1 6670,4330 P6.2
  Bottom Layer w30: U1.21 6075,4160 ; v1(6150,2995) 6150,3604.77 ; 6325,4160 U1.1
VCC5V: C5.1 C7.2 C10.2 C11.2 L2.2 P3.2 P5.1 R5.2 R6.1 U1.3 U6.1 U6.3 | length 4392.5
  Top Layer w10: U6.3 U6.3@6309.8,2557.48 ; P3.2@6775,2758.62 P3.2
  Top Layer w20: R5.2 5440,2195 5455,2210 5455,2394.14 5460.86,2400 R6.1 5550.63,2509.06 5565,2523.43 C5.1 ; C11.2@6274.45,2455 6235,2494.45 6235,2594.14 6240.86,2600 6303.95,2600 6309.8,2594.14 U6.3@6309.8,2557.48 ; U6.3 6345.6,2547.64 6351.46,2553.5 6351.46,2704.14 6357.31,2710 6726.38,2710 P3.2@6775,2758.62
  Top Layer w25: P3.2 6840,2758.62 v2(6840,3685)
  Top Layer w40: 5650,2500 5750,2400 5750,2160.86 5755.86,2155 6269.77,2155 6275.63,2160.86 C10.2
  Top Layer w50: 5653.57,2633.57 P5.1 ; C10.2 C11.2
  Bottom Layer w25: U1.3 6770,3690 6835,3690 v2(6840,3685)
VCC6V: C4.1 C6.2 L1.2 P2.2 R3.2 R4.1 | length 620.5
  Top Layer w20: R3.2 5284.37,2949.81 5296.66,2962.11 5298.28,2962.11 5310,2973.82 5310,3155 ; 5310,3216.13 5310,3155 ; R4.1 5310,3155
  Top Layer w50: C4.1@5408.7,3338.7 5525.56,3455.56 P2.2
VCCBAT: C1.1 S1.2 U2.2 U3.2
pads on no net: M1.1 M2.1 P4.4 S1.3 U1.22 U1.23 U1.24 U1.30 U1.31 U1.37 U6.4 U7.6 U7.8

## Polygon pours and split planes (outlines as drawn)
VCC on Top Layer "VCC_L01_P006" (solid, pour order 6): 4380,3725 4380,2145 4410,2115 4784.92,2115 4775,3725
VCCBAT on Top Layer "r" (solid, pour order 0): 5650,4415 5710,4355 5705,4160 5645,4100 4375,4100 4375,4308.85 4490,4415 5035,4415
VCC3v3 on Top Layer "VCC3V3_L01_P019" (solid, pour order 19): 6120,2785 6120,2660 6120,2575 6210,2575 6210,2620 6260,2620 6260,2785
VCC5V on Top Layer "yr" (solid, pour order 17): 5285,2795 5285,2635 5335,2585 5335,2490 5355,2470 5650,2470 5680,2500 5680,2665 5525,2665 5395,2795
VCC6V on Top Layer "VCC6V_L01_P016" (solid, pour order 16): 5105,3525 5104.98,3524.98 5104.98,3340.02 5145,3300 5145,3220 5155,3210 5460,3210 5470,3220 5470,3390 5460,3400 5360,3400 5235,3525
VCC on Top Layer "VCC_L01_P015" (solid, pour order 15): 4963.91,2401.88 4963.91,2320 4770,2320 4770,2401.46
VCC on Top Layer "VCC_L01_P014" (solid, pour order 14): 4893.91,3146.88 4893.91,3063.02 4739.54,3063.02 4737.35,3065.22 4737.35,3146.54
VCCBAT on Top Layer "VCCBAT_L01_P013" (solid, pour order 13): 4760.1,3742.2 4762.29,3740 4980,3740 5130,3821.02 5130,4105 4755,4105 4760.1,4099.9
VCCBAT on Top Layer "VCCBAT_L01_P009" (solid, pour order 9): 4580,3815 4760,3735 4765,4110 4580,4110
VCC on Top Layer "VCC_L01_P008" (solid, pour order 8): 4390,3720 4390,4090 4575,4090 4575,3810 4775.26,3724.65
GND on Bottom Layer "GND_L02_P024" (solid, pour order 24): 4375,2165 4375,4710 cw(c4425,4710) 4425,4760 4440,4760 6820,4760 cw(c6820,4710) 6870,4710 6870,2160 cw(c6825,2160) 6825,2115 4425,2115 cw(c4425,2165)
VCC3v3 on Bottom Layer "VCC3V3_L02_P022" (solid, pour order 22): 6344.57,3585 6369.57,3610 6365,4190 6350,4205 6065,4205 6040,4180 6040,3610 6065,3585

## Keep-outs
Keep-Out Layer:
  the board outline again, w10

## Other copper
Top Layer:
  rectangle net GND: 5540,2740 5590,2850
  rectangle net GND: 5365,3470 5415,3580
  rectangle net NetC3_1: 5105,2415 5190,2460
  rectangle net NetC2_1: 5035,3160 5110,3205

## Silkscreen, mask and mechanical layers (free items; w line width, h text height)
Top Overlay:
  lines w10: 4696.3,4680.94 4700,4680.94 4700,4745 5189.22,4745 5189.22,4679.94 5188.76,4679.94 ; 5240.17,4680.94 5240,4680.94 5240,4745 5733.08,4745 5733.08,4680.94 ; 5602.43,3306.26 5540.1,3306.26 5540.1,3310 5540,3310 5540,3605 5605,3605 ; 5603.57,2861.22 5540,2861.22 5540,3261.22 5603.57,3261.22 ; 6420,4490 6420,4570 6820,4570 6820,4490 ; 6649.82,2985.56 6729.82,2985.56 ; 6649.82,3485.56 6729.82,3485.56 ; 6650,3173.54 6650,3673.54 ; 6650,4245 6650,3757.73 6727.73,3757.73 6730,3760 ; 6650,4258 6730,4258 ; 6730,2208.62 6650,2208.62 6650,2908.62 6730,2908.62 ; 5250,3715 5305,3715 5305,4020 5250,4020 5250,3715
  text "编码器1" at 4860,4695.09 h50
  text "编码器2" at 5406.62,4694.82 h50
  text "OLED" at 6665,4550.49 h60 r180
  text "-" at 5565,4035.19 h100
  text "-" at 4440,4025.19 h100
  text "+" at 4965,4022.44 h100
  text "+" at 5110,4022.44 h100
  text "ON" at 4535,4009.43 h70
  text "OFF" at 4755,4009.43 h70
  text "RPWM" at 5410,3999.22 h50
  text "LPWM" at 5530,3999.22 h50
  text "驱动接口" at 5259.87,3970 h50 r270
  text "剩余IO口" at 6708.89,3905 h60 r90
  text "RDIR" at 5405,3639.22 h50
  text "LDIR" at 5530,3639.22 h50
  text "舵机" at 5555.27,3500 h50 r270
  text "蓝牙" at 6709.37,3175.04 h60 r90
  text "超声波" at 5554.87,3145 h50 r270
  text "红外循迹" at 6713.89,2435 h60 r90